# Allegro board ARDUINO_STM8_LCD_NRF24.brd
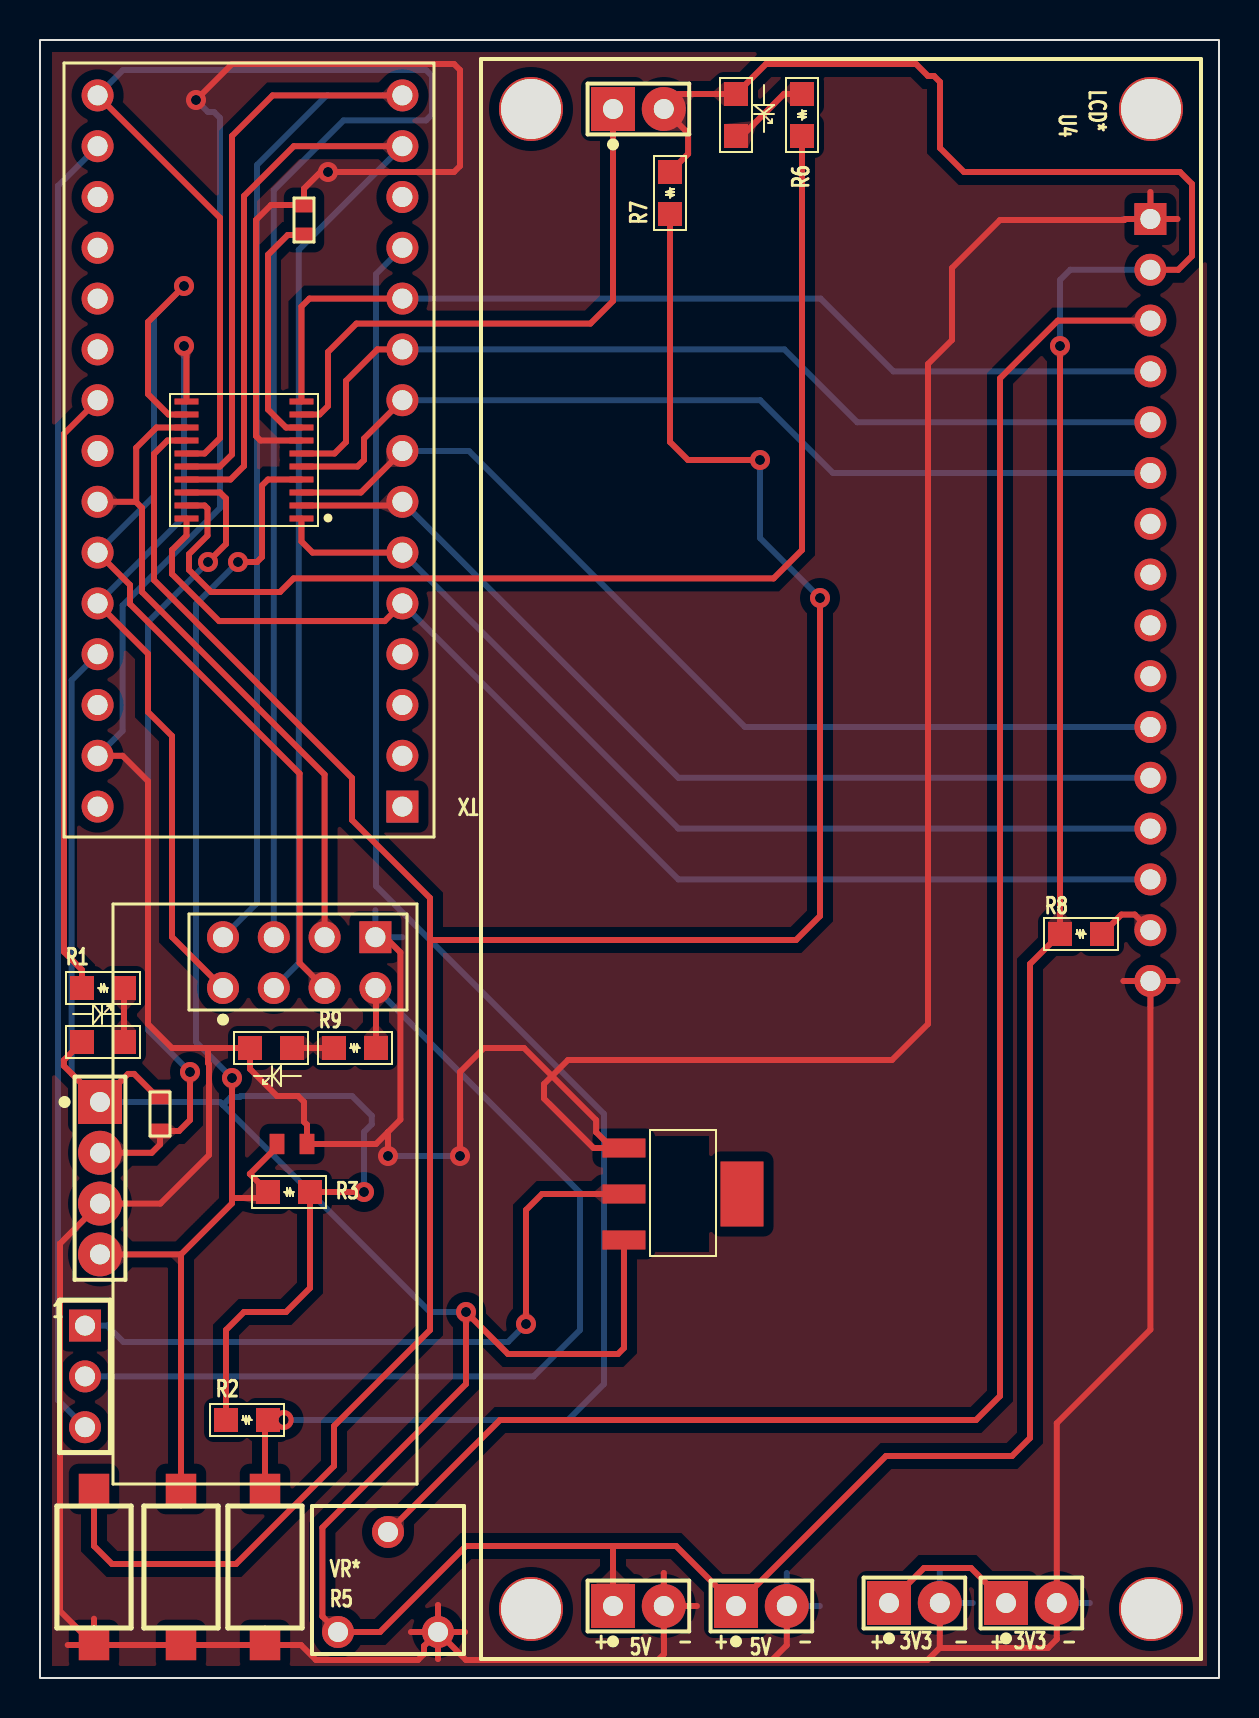
[diagram p0: board, top side]
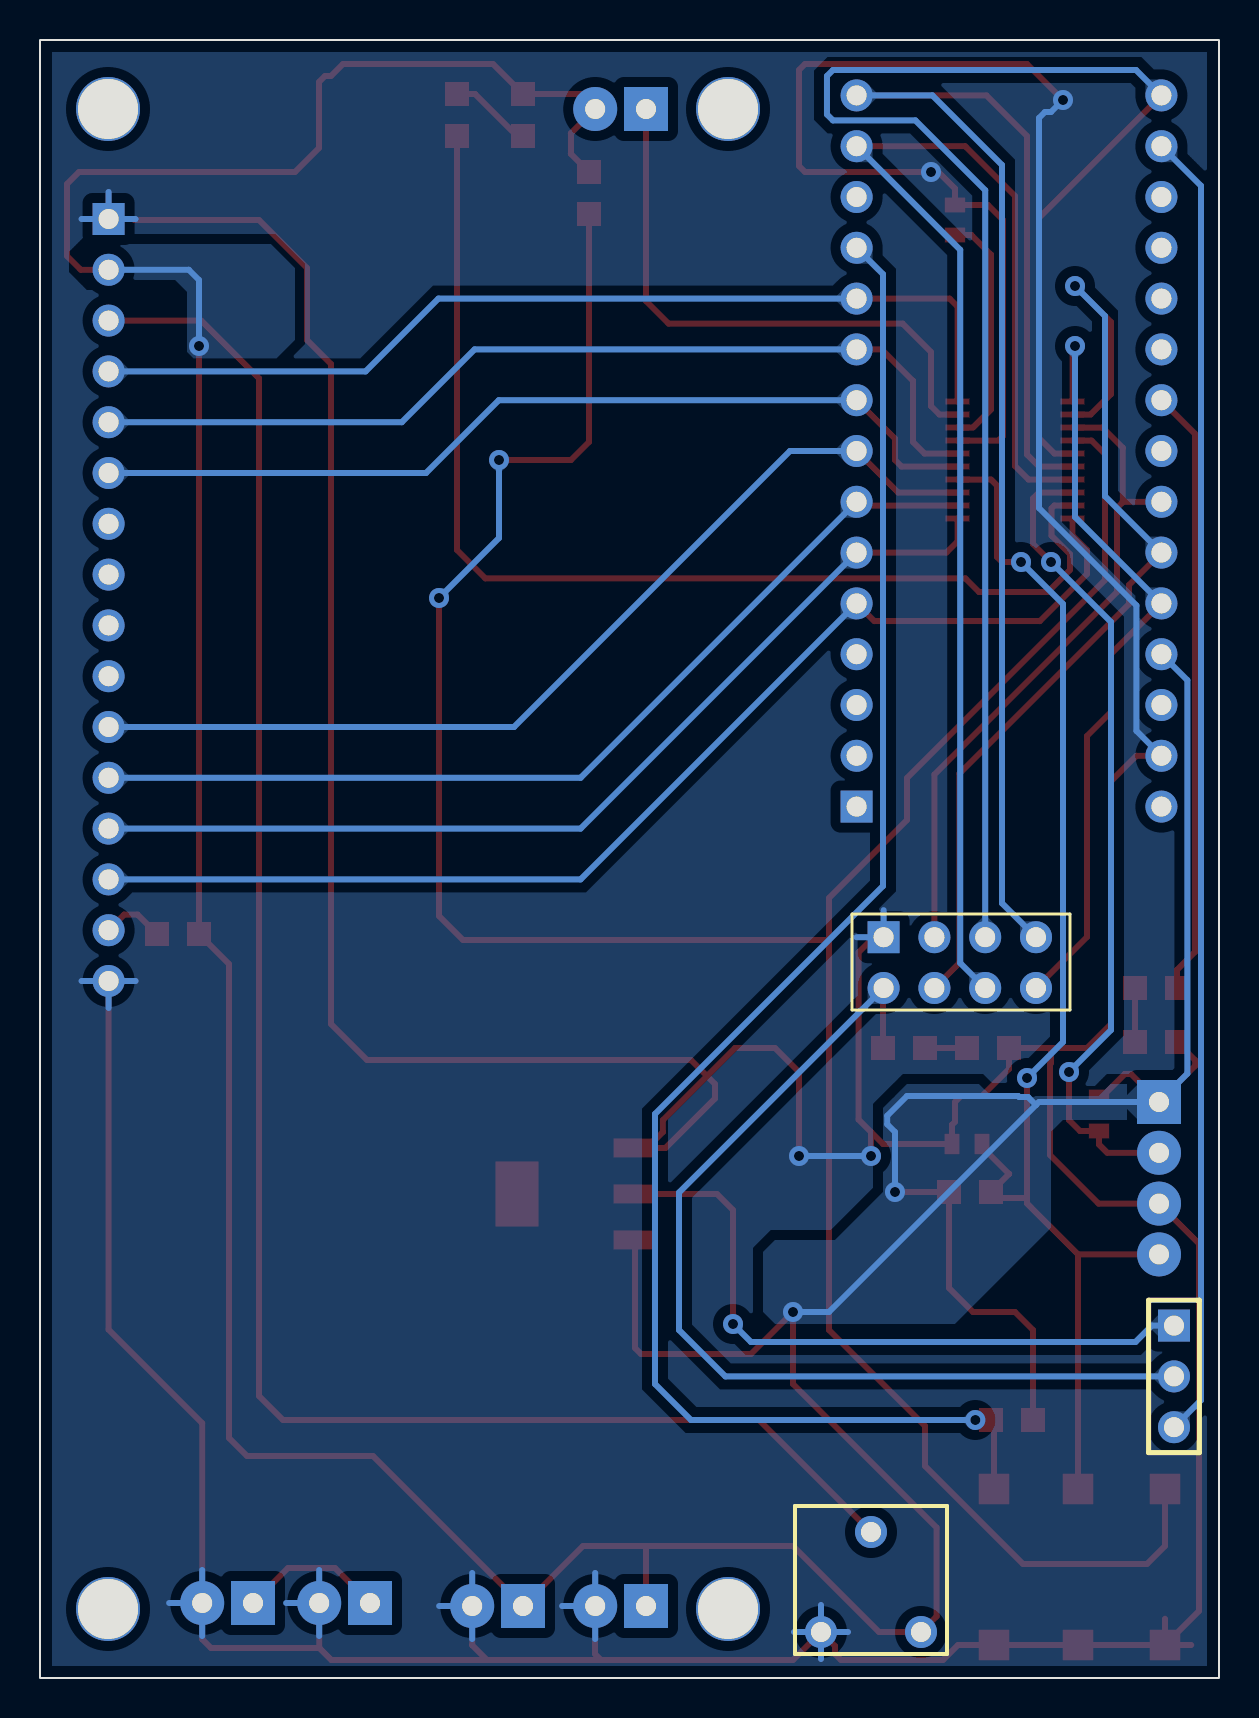
[diagram p1: board, bottom side, seen from below]

Outline 58.95 x 81.9 mm; copper layers: TOP, BOTTOM. Coordinates in mm from the lower left corner of the outline.
Outline path: rectangle 0,0 58.95,81.9

## Design rules (mm)
constraint set DEFAULT: min track width 0.3, pair gap 0.3

## Placement (name value [footprint] x y rotation side)
ARD BUT  RESET BUTTON  [SMD_2PIN_BUTTON]  11.25 5.55 90 top
C1  10nF  [CAP_SMD_0603]  12.6 26.7 0 top
C2  1uF  [CAP_SMD_0603]  13.2 72.9 90 top
D1  LED  [LED_SMD_0805]  4.2 31.8 180 top
D2  LED  [LED_SMD_0805]  34.8 77.1 90 top
D3  LED  [LED_SMD_0805]  10.5 31.5 0 top
J1  CON2  [J1_2_254]  28.65 78.45 0 top
J2  CON2  [J1_2_254]  34.8 3.6 0 top
J3  CON2  [J1_2_254]  28.65 3.6 0 top
J4  CON2  [J1_2_254]  48.3 3.75 0 top
J5  CON2  [J1_2_254]  42.45 3.75 0 top
J6  SWIM  [J1_4_254]  3 28.8 270 top
J7  CON3  [J1_3_254]  2.25 16.35 270 top
R1  1K  [RES_SMD_0805]  4.2 34.5 180 top
R2  1K  [RES_SMD_0805]  9.3 12.9 0 top
R3  10k  [RES_SMD_0805]  13.5 24.3 180 top
R4  1K  [RES_SMD_0603]  6 28.2 270 top
R5  10K  [BIENTRO]  17.4 4.8 0 top
R6  1K  [RES_SMD_0805]  38.1 79.2 270 top
R7  1K  [RES_SMD_0805]  31.5 75.3 270 top
R8  330  [RES_SMD_0805]  51 37.2 0 top
R9  330R  [RES_SMD_0805]  14.7 31.5 0 top
RESET  RESET BUTTON  [SMD_2PIN_BUTTON]  7.05 5.55 270 top
STM BUT  RESET BUTTON  [SMD_2PIN_BUTTON]  2.7 5.55 90 top
U1  ArduinoNanoModule  [ARDUINO_NANO_MODULE]  10.5 61.35 180 top
U2  AMS1117  [SOT223]  32.1 24.3 270 top
U3  stm8s003f3p6-TSSOP20  [TSSOP20]  10.2 60.9 90 top
U4  -  [LCD1602]  40.05 40.95 270 top
U5  nRF24L01_Module  [NRF24L01_MODULE]  9.15 34.5 0 top

## Library data of the parts
ARD BUT RESET STM BUT = SW_PB_SPST
C1 = CAP NP
C2 = CAP_0
D1-D3 = LED
J1-J5 = CON2
J6 = CON4
J7 = CON3
R1-R4 R6-R9 = R
R5 = RESISTOR VAR
U1 = ArduinoNanoModule
U2 = ASM1117
U3 = stm8s003f3p6-TSSOP20
U4 = LCD1602_6
U5 = nRF24L01_Module

## Footprints (pads in the part's own frame, mm; a bottom-side part is the same pattern mirrored in y, then rotated)
ARDUINO_NANO_MODULE
  rect 1.6x1.6 hole 1: 1(-7.62,17.78)
  round 1.6 hole 1: 2(-7.62,15.24) 3(-7.62,12.7) 4(-7.62,10.16) 5(-7.62,7.62) 6(-7.62,5.08) 7(-7.62,2.54) 8(-7.62,0) 9(-7.62,-2.54) 10(-7.62,-5.08) 11(-7.62,-7.62) 12(-7.62,-10.16) 13(-7.62,-12.7) 14(-7.62,-15.24) 15(-7.62,-17.78) 16(7.62,-17.78) 17(7.62,-15.24) 18(7.62,-12.7) 19(7.62,-10.16) 20(7.62,-7.62) 21(7.62,-5.08) 22(7.62,-2.54) 23(7.62,0) 24(7.62,2.54) 25(7.62,5.08) 26(7.62,7.62) 27(7.62,10.16) 28(7.62,12.7) 29(7.62,15.24) 30(7.62,17.78)
BIENTRO
  round 1.6 hole 1: 1(-2.5,-2.5) 2(0,2.5) 3(2.5,-2.5)
CAP_SMD_0603
  rect 0.74x1.02 smd: 1(-0.75,0) 2(0.75,0)
J1_2_254
  rect 2.2x2.2 hole 1: 1(0,0)
  round 2.2 hole 1: 2(2.54,0)
J1_3_254
  rect 1.6x1.6 hole 1: 1(-1.27,0)
  round 1.6 hole 1: 2(1.27,0) 3(3.81,0)
J1_4_254
  rect 2.2x2.2 hole 1: 1(0,0)
  round 2.2 hole 1: 2(2.54,0) 3(5.08,0) 4(7.62,0)
LCD1602
  rect 1.6x1.6 hole 1: 1(-32,15.47)
  round 1.6 hole 1: 2(-29.46,15.47) 3(-26.92,15.47) 4(-24.38,15.47) 5(-21.84,15.47) 6(-19.3,15.47) 7(-16.76,15.47) 8(-14.22,15.47) 9(-11.68,15.47) 10(-9.14,15.47) 11(-6.6,15.47) 12(-4.06,15.47) 13(-1.52,15.47) 14(1.02,15.47) 15(3.56,15.47) 16(6.1,15.47)
  round 3.2 hole 3: 17(37.5,15.5) 18(37.5,-15.5) 19(-37.5,-15.5) 20(-37.5,15.5)
LED_SMD_0805
  rect 1.2x1.2 smd: 1(0,0) 2(2.1,0)
NRF24L01_MODULE
  rect 1.6x1.6 hole 1: 1(7.62,2.54)
  round 1.6 hole 1: 2(7.62,0) 3(5.08,2.54) 4(5.08,0) 5(2.54,2.54) 6(2.54,0) 7(0,2.54) 8(0,0)
RES_SMD_0603
  rect 0.74x1.02 smd: 1(-0.85,0) 2(0.85,0)
RES_SMD_0805
  rect 1.2x1.2 smd: 1(0,0) 2(2.1,0)
SMD_2PIN_BUTTON
  rect 1.524x1.524 smd: 1(-3.9,0) 2(3.9,0)
SOT223
  rect 3.25x2.15 smd: (0.1,3)
  rect 0.95x2.15 smd: 1(-2.201,-2.901) 2(0.099,-2.901) 3(2.399,-2.901)
TSSOP20
  rect 0.3x1.2 smd: 1(-2.925,-2.875) 2(-2.275,-2.875) 3(-1.625,-2.875) 4(-0.975,-2.875) 5(-0.325,-2.875) 6(0.325,-2.875) 7(0.975,-2.875) 8(1.625,-2.875) 9(2.275,-2.875) 10(2.925,-2.875) 11(2.925,2.875) 12(2.275,2.875) 13(1.625,2.875) 14(0.975,2.875) 15(0.325,2.875) 16(-0.325,2.875) 17(-0.975,2.875) 18(-1.625,2.875) 19(-2.275,2.875) 20(-2.925,2.875)

## Nets
3V3: J4.1 J5.1
5V: D1.2 D2.2 J1.2 J2.1 J3.1 J6.1 R2.1 R3.1 R4.1 R5.1 R7.1 R8.1 U1.27 U2.3 U4.2
GND: ARD BUT.1 C1.2 C2.2 D3.1(CATHODE) J2.2 J3.2 J4.2 J5.2 J6.3 R5.3 RESET.2 STM BUT.1 U1.29 U2.1 U3.7 U4.1 U4.16 U5.1
AMS_3V3: J7.1 U2.2(VOUT)
ARD_3V3: J7.3 U1.17
ARD_A3: R1.2 U1.22
ARD_A4: U1.23
ARD_A5: U1.24 U3.13 U5.3
ARD_A6: U1.25 U3.12 U5.4
ARD_A7: U1.26 U3.11 U5.8
ARD_D2: U1.5 U3.20 U4.14
ARD_D3: U1.6 U3.1 U4.13
ARD_D4: U1.7 U3.2 U4.12
ARD_D5: U1.8 U3.3 U4.11
ARD_D6: U1.9 U3.5 U4.6
ARD_D7: U1.10 U3.6 U4.5
ARD_D8: U1.11 U3.10([SPI_NSS]TIM2_CH3[HS]/PA3) U4.4
ARD_D9: ARD BUT.2 R2.2 U1.12
ARD_MISO: U1.14 U3.17 U5.6
ARD_MOSI: U1.15 U3.16 U5.7
ARD_SCK: U1.16 U3.15 U5.5
NRF_3V3: J7.2 R9.2 U5.2(VCC)
RESET: C1.1 J6.4 R3.2 RESET.1 U3.4
STM_5V: J1.1 U3.9
STM_BUTTON: R7.2 STM BUT.2 U3.14
STM_D2: R6.2 U3.19
SWIM: J6.2 R4.2 U3.18
N006761: D1.1(CATHODE) R1.1
N31472: R5.2(WIPER) U4.3(VO)
N31560: R8.2 U4.15
N76520: C2.1 U3.8
N80184: D2.1(CATHODE) R6.1
N829650: D3.2 R9.1

Pads without a net: U1 1 2 3 4 13 18 19 20 21 28 30; U4 7 8 9 10 17 18 19 20

## Via types
v1: diameter 1, hole 0.5, TOP to BOTTOM, 17 vias

## Routing (per net, layer and track width the routed paths; a pad name or vN(x,y) marks a point on that pad's centre or on a via; arc(x,y) is an arc through that point)
3V3: length 7.3
  TOP w0.3: J4.1 46.55,5.5 44.2,5.5 J5.1
5V: length 266.1
  TOP w0.3: 28.65,6.6 21.3,6.6 17,2.3 R5.1 14.12,3.08 14.12,7.52 21.3,14.7 v1(21.3,18.3) 23.4,16.2 28.9,16.2 29.2,16.5 U2.3 ; 28.65,6.6 J3.1 ; 28.65,6.6 31.8,6.6 J2.1 42.3,11.1 48.6,11.1 49.5,12 49.5,35.7 R8.1 v1(51,66.6) ; U4.2 56.91,70.41 57.6,71.1 57.6,74.7 57,75.3 46.2,75.3 45,76.5 45,79.8 44.7,80.1 44.4,80.1 43.8,80.7 36.3,80.7 D2.2 31.94,79.2 J1.2 32.4,77.24 32.4,76.2 R7.1 ; R4.1 5.86,29.05 4.71,30.2 4.4,30.2 J6.1 1.2,30.6 1.2,30.9 D1.2 ; R2.1 9.3,17.4 10.2,18.3 12.3,18.3 13.5,19.5 R3.1 v1(16.2,24.3)
  BOTTOM w0.3: 9.15,28.65 9.55,29.05 9.99,29.05 10.04,29.1 15.6,29.1 16.59,28.11 16.59,27.69 16.2,27.3 v1(16.2,24.3) ; 9.15,28.65 9,28.8 J6.1 1.58,30.22 1.58,49.89 U1.27 ; 9.15,28.65 19.5,18.3 v1(21.3,18.3) ; v1(51,66.6) 51,69.9 51.51,70.41 U4.2
GND: length 398.7
  TOP w0.3: R5.3 19.9,3.65 ; R5.3 19.9,0.95 ; R5.3 18.55,2.3 ; R5.3 21.25,2.3 ; R5.3 19.2,1.6 19.2,1.2 18.9,0.9 13.8,0.9 13.05,1.65 ARD BUT.1 RESET.2 STM BUT.1 ; R5.3 21.3,0.9 30.9,0.9 ; U5.1 17.26,37.04 18.02,36.28 18.02,27.92 17.4,27.3 ; U4.1 56.87,72.95 ; U4.1 54.27,72.95 54.22,72.9 48,72.9 45.6,70.5 45.6,66.9 44.4,65.7 44.4,32.7 42.6,30.9 26.4,30.9 25.2,29.7 25.2,28.97 27.67,26.5 28.6,26.5 ; U4.1 55.52,74.3 ; 17.4,27.3 v1(17.4,26.1) ; 17.4,27.3 16.8,26.7 C1.2 13.35,27.66 13.2,27.81 13.2,28.8 12.9,29.1 11.85,29.1 10.5,30.45 D3.1 8.4,31.5 ; STM BUT.1 1,3.35 1,21.72 J6.3 6.02,23.72 8.45,26.15 8.45,30.69 8.4,30.74 8.4,31.5 ; STM BUT.1 2.7,2.96 ; STM BUT.1 1.39,1.65 ; 13.07,61.88 11.02,61.88 10.8,62.1 10.8,72.9 11.55,73.65 C2.2 13.2,74.47 14.03,75.3 v1(14.4,75.3) 20.7,75.3 21,75.6 21,80.4 20.7,80.7 9.6,80.7 v1(7.8,78.9) ; J3.2 32.84,3.6 ; J3.2 31.19,2.05 31.2,2.04 31.2,1.2 30.9,0.9 ; J3.2 31.19,5.25 ; 8.4,31.5 6.6,31.5 5.4,32.7 5.4,44.84 4.13,46.11 U1.29 ; 54.17,34.85 U4.16 ; U4.16 55.52,17.42 50.84,12.74 J4.2 50.84,1.94 50.4,1.5 44.98,1.5 ; U4.16 56.87,34.85 ; J2.2 37.34,1.64 36.6,0.9 ; v1(21,26.1) 21,30.3 22.2,31.5 24.2,31.5 27.81,27.89 27.81,27.29 28.6,26.5 ; 28.6,26.5 U2.1 ; 30.9,0.9 36.6,0.9 ; J5.2 44.99,1.51 44.98,1.5 ; 36.6,0.9 44.38,0.9 44.98,1.5
  BOTTOM w0.3: U4.1 55.52,74.3 ; U4.1 56.87,72.95 ; U4.1 54.17,72.95 ; U4.16 56.87,34.85 ; U4.16 54.17,34.85 ; U4.16 55.52,33.5 ; 18.12,37.04 U5.1 16.77,38.39 ; R5.3 21.25,2.3 ; R5.3 19.9,0.95 ; R5.3 18.55,2.3 ; R5.3 19.9,3.65 ; 31.19,1.95 J3.2 ; J3.2 31.19,5.25 ; J3.2 32.84,3.6 ; J2.2 37.34,5.25 ; J2.2 38.99,3.6 ; J2.2 37.34,1.95 ; J5.2 46.64,3.75 ; J5.2 44.99,2.1 ; J5.2 44.99,5.4 ; J4.2 50.84,5.4 ; J4.2 52.49,3.75 ; J4.2 50.84,2.1 ; v1(17.4,26.1) v1(21,26.1) ; v1(7.8,78.9) 8.4,78.3 8.7,78.3 9,78 9,58.5 4.13,53.63 4.13,47.36 U1.29
AMS_3V3: length 33.7
  TOP w0.3: U2.2 25.1,24.2 24.3,23.4 v1(24.3,17.7)
  BOTTOM w0.3: J7.1 3.35,17.62 4.17,16.8 23.4,16.8 v1(24.3,17.7)
ARD_3V3: length 65.4
  BOTTOM w0.3: U1.17 0.9,74.61 0.9,13.89 J7.3
ARD_A3: length 30.5
  TOP w0.3: U1.22 1.2,62.21 1.2,36.3 2.1,35.4 R1.2
ARD_A5: length 33.2
  TOP w0.3: 4.81,58.81 4.81,58.79 5.1,58.5 5.1,54.3 14.23,45.17 U5.3 ; 4.81,58.81 4.81,61.51 5.82,62.52 7.32,62.52 ; 4.81,58.81 U1.24
ARD_A6: length 50.1
  TOP w0.3: v1(7.2,69.6) 5.4,67.8 5.4,64.2 6.42,63.18 U3.12 ; U1.25 4.5,54.65 4.5,53.7 12.98,45.22 12.98,35.75 U5.4
  BOTTOM w0.3: v1(7.2,69.6) 5.7,68.1 5.7,59.09 U1.25
ARD_A7: length 39.3
  TOP w0.3: U5.8 6.6,37.05 6.6,47.1 5.4,48.3 5.4,51.21 U1.26 ; U3.11 7.32,66.47 v1(7.2,66.6)
  BOTTOM w0.3: v1(7.2,66.6) 7.2,58.05 U1.26
ARD_D2: length 59.1
  TOP w0.3: U3.20 7.32,57.12 6.6,56.4 6.6,55.2 8.95,52.85 17.24,52.85 U1.5
  BOTTOM w0.3: U4.14 31.92,39.93 U1.5
ARD_D3: length 49.5
  TOP w0.3: U1.6 13.63,56.27 13.07,56.83 U3.1
  BOTTOM w0.3: U4.13 31.92,42.47 U1.6
ARD_D4: length 48.2
  TOP w0.3: U1.7 17.93,58.62 13.07,58.62
  BOTTOM w0.3: U4.12 31.92,45.01 U1.7
ARD_D5: length 49
  TOP w0.3: U1.8 16.04,59.27 U3.3
  BOTTOM w0.3: U4.11 35.25,47.55 21.45,61.35 U1.8
ARD_D6: length 46
  TOP w0.3: 13.07,60.58 15.88,60.58 16.2,60.9 16.2,61.97 U1.9
  BOTTOM w0.3: U1.9 36.01,63.89 39.65,60.25 U4.6
ARD_D7: length 47.9
  TOP w0.3: U1.10 16.87,66.43 15.3,64.86 15.3,61.8 14.72,61.23 U3.6
  BOTTOM w0.3: U1.10 37.22,66.43 40.86,62.79 U4.5
ARD_D8: length 48.9
  TOP w0.3: U3.10 13.07,68.58 13.47,68.97 U1.11
  BOTTOM w0.3: U4.4 42.67,65.33 39.03,68.97 U1.11
ARD_D9: length 83.1
  TOP w0.3: ARD BUT.2 11.25,12.75 R2.2 v1(12.18,12.9)
  BOTTOM w0.3: v1(12.18,12.9) 26.4,12.9 28.2,14.7 28.2,28.2 16.8,39.6 16.8,70.19 U1.12
ARD_MISO: length 70.4
  TOP w0.3: U1.14 12.69,76.59 10.2,74.1 10.2,60.6 9.52,59.93 U3.17
  BOTTOM w0.3: U1.14 12.94,71.41 12.94,35.75 U5.6
ARD_MOSI: length 75.8
  TOP w0.3: U1.15 11.63,79.13 9.6,77.1 9.6,61.18 9,60.58 U3.16
  BOTTOM w0.3: U1.15 14.33,79.13 10.85,75.65 10.85,38.74 U5.7
ARD_SCK: length 87.8
  TOP w0.3: U1.16 9,73.01 9,62 8.23,61.23 7.32,61.23
  BOTTOM w0.3: U1.16 4.15,80.4 19.3,80.4 19.6,80.1 19.6,78.18 19.3,77.88 15.18,77.88 11.69,74.39 U5.5
NRF_3V3: length 50.1
  TOP w0.3: R9.2 16.8,34.47 U5.2
  BOTTOM w0.3: U5.2 27,24.27 27,17.4 24.68,15.08 J7.2
RESET: length 65.3
  TOP w0.3: 9.6,24 9.6,23.73 7.05,21.18 ; 9.6,24 v1(9.6,30) ; 9.6,24 11.1,24 R3.2 10.5,25.2 10.5,25.21 11.85,26.56 C1.1 ; 7.05,21.18 J6.4 ; 7.05,21.18 RESET.1 ; U3.4 11.4,59.93 11.1,59.62 11.1,56.05 10.85,55.8 v1(9.9,55.8)
  BOTTOM w0.3: v1(9.6,30) 7.8,31.8 7.8,53.7 v1(9.9,55.8)
STM_5V: length 29.1
  TOP w0.3: J1.1 28.65,68.85 27.52,67.72 15.82,67.72 14.4,66.3 14.4,63.6 13.98,63.18 13.07,63.18
STM_BUTTON: length 137.8
  TOP w0.3: v1(36,60.9) 32.4,60.9 31.5,61.8 R7.2 ; STM BUT.2 2.7,6.6 3.6,5.7 9.8,5.7 14.7,10.6 14.7,12.6 19.5,17.4 19.5,36.9 ; 19.5,36.9 19.5,39 15.6,42.9 15.6,45 5.7,54.9 5.7,61.2 6.37,61.88 U3.14 ; 19.5,36.9 37.8,36.9 39,38.1 v1(39,54)
  BOTTOM w0.3: v1(39,54) 36,57 v1(36,60.9)
STM_D2: length 57.2
  TOP w0.3: R6.2 38.1,56.4 36.68,54.98 12.68,54.98 12,54.3 8.56,54.3 7.45,55.41 7.45,56.19 8.38,57.12 8.38,58.48 8.23,58.62 7.32,58.62
SWIM: length 41.2
  TOP w0.3: J6.2 5.58,26.26 6,26.68 R4.2 6.95,27.35 7.5,27.9 v1(7.5,30.3) ; v1(8.4,55.8) 9.3,56.7 9.3,58.98 9,59.27 U3.18
  BOTTOM w0.3: v1(8.4,55.8) 5.4,52.8 5.4,32.4 v1(7.5,30.3)
N006761: length 2.7
  TOP w0.3: D1.1 R1.1
N31472: length 93
  TOP w0.3: U4.3 50.89,67.87 48,64.98 48,14.1 46.8,12.9 23,12.9 R5.2
N31560: length 3.1
  TOP w0.3: R8.2 54.07,38.17 54.74,38.17 U4.15
N76520: length 12
  TOP w0.3: C2.1 12.39,72.15 11.4,71.16 11.4,63.43 12.3,62.52 U3.8
N80184: length 4.2
  TOP w0.3: D2.1 35.1,77.1 37.2,79.2 R6.1
N829650: length 2.1
  TOP w0.3: D3.2 R9.1

## Copper pours and planes (outline as drawn; the poured copper is in the pictures)
5V on BOTTOM: 22.2,17.7 13.2,17.7 8.4,22.5 8.4,27.3 7.8,27.9 2.4,27.9 2.4,29.7 5.4,29.7 6,29.1 11.4,29.1 12,29.7 15.6,29.7 16.8,28.5 16.8,24.3 19.2,21.9 22.2,21.9 22.8,21.3 22.8,18.3
5V on BOTTOM: 56.4,71.7 57,71.1 57,70.5 56.4,69.9 52.2,69.9 51.6,69.3 51.6,66.3 51,65.7 47.4,65.7 46.2,66.9 46.2,70.5 47.4,71.7
GND on TOP: 0.6,0.6 0.6,81.3 58.35,81.3 58.35,0.6 ; 22 cut-outs
GND on BOTTOM: 0.6,0.6 0.6,81.3 58.35,81.3 58.35,0.6 ; 23 cut-outs

Small or netless copper shapes (teardrops, artwork), in the pictures only: 40 on TOP, 40 on BOTTOM

## Text on the board
Ref Des/Silkscreen Top: + | 5V | - | 3V3
